# EAGLE board otto_single_sided (EAGLE 7.6.0)
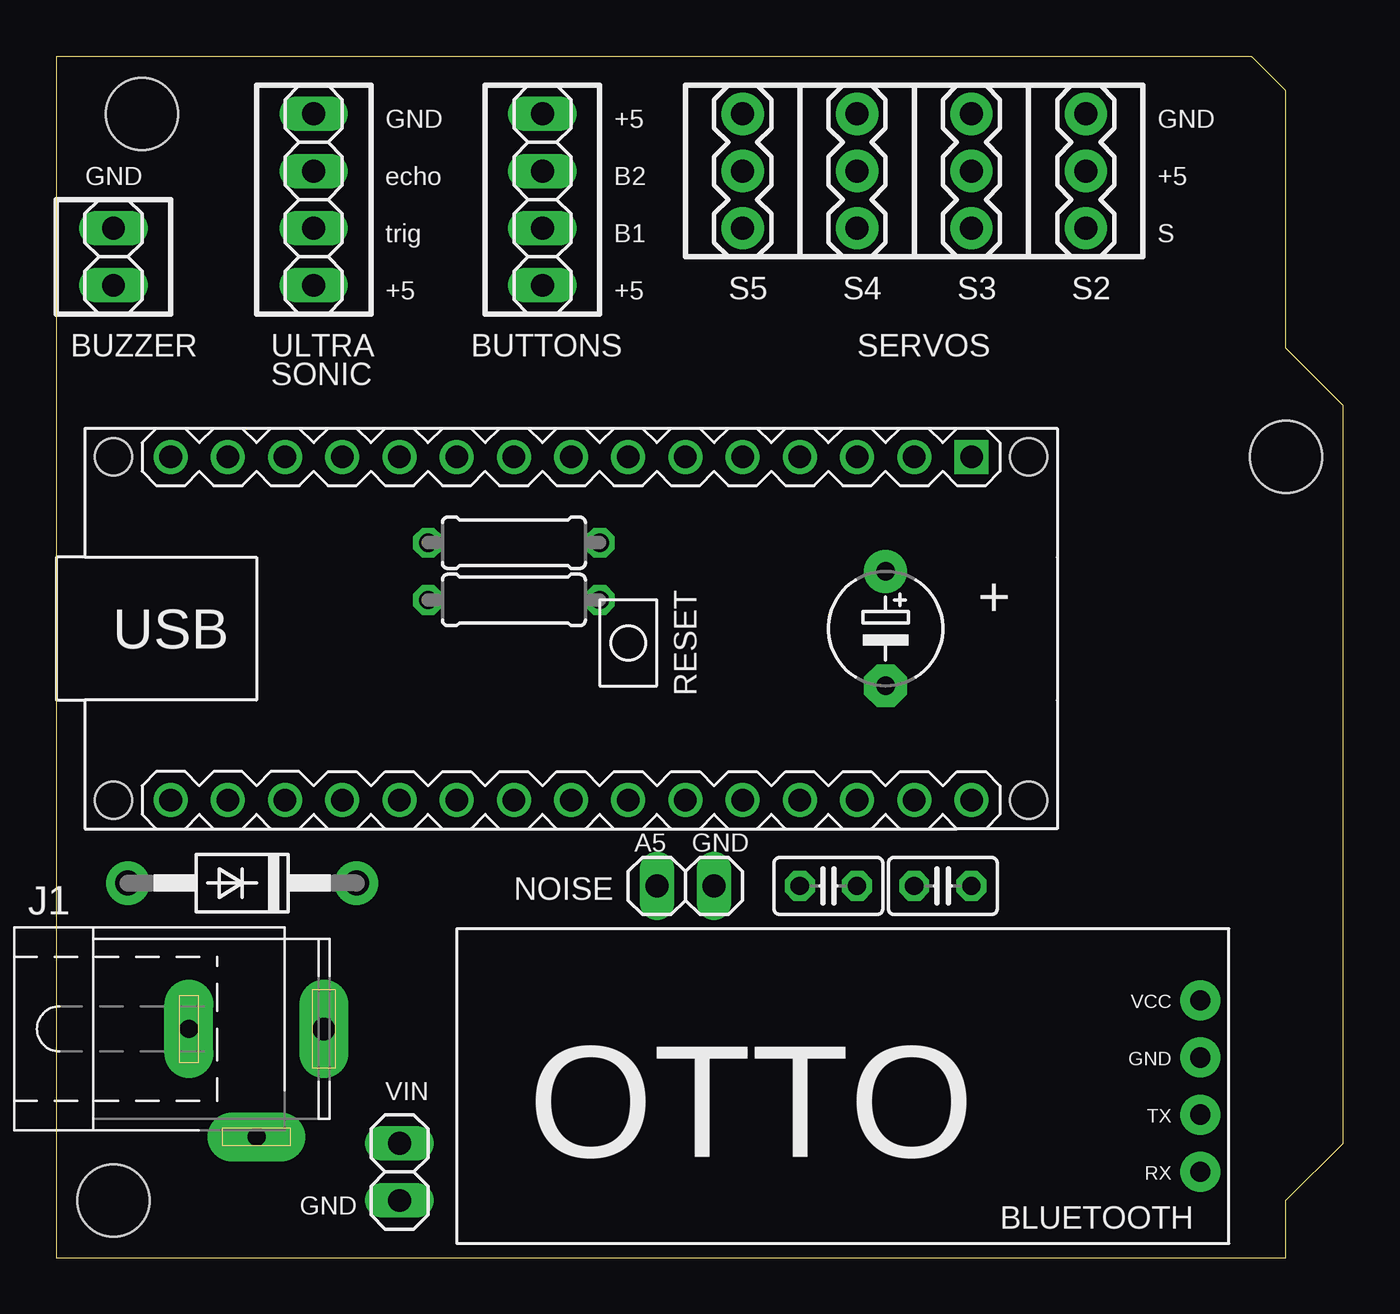
[diagram p0: board, top side]
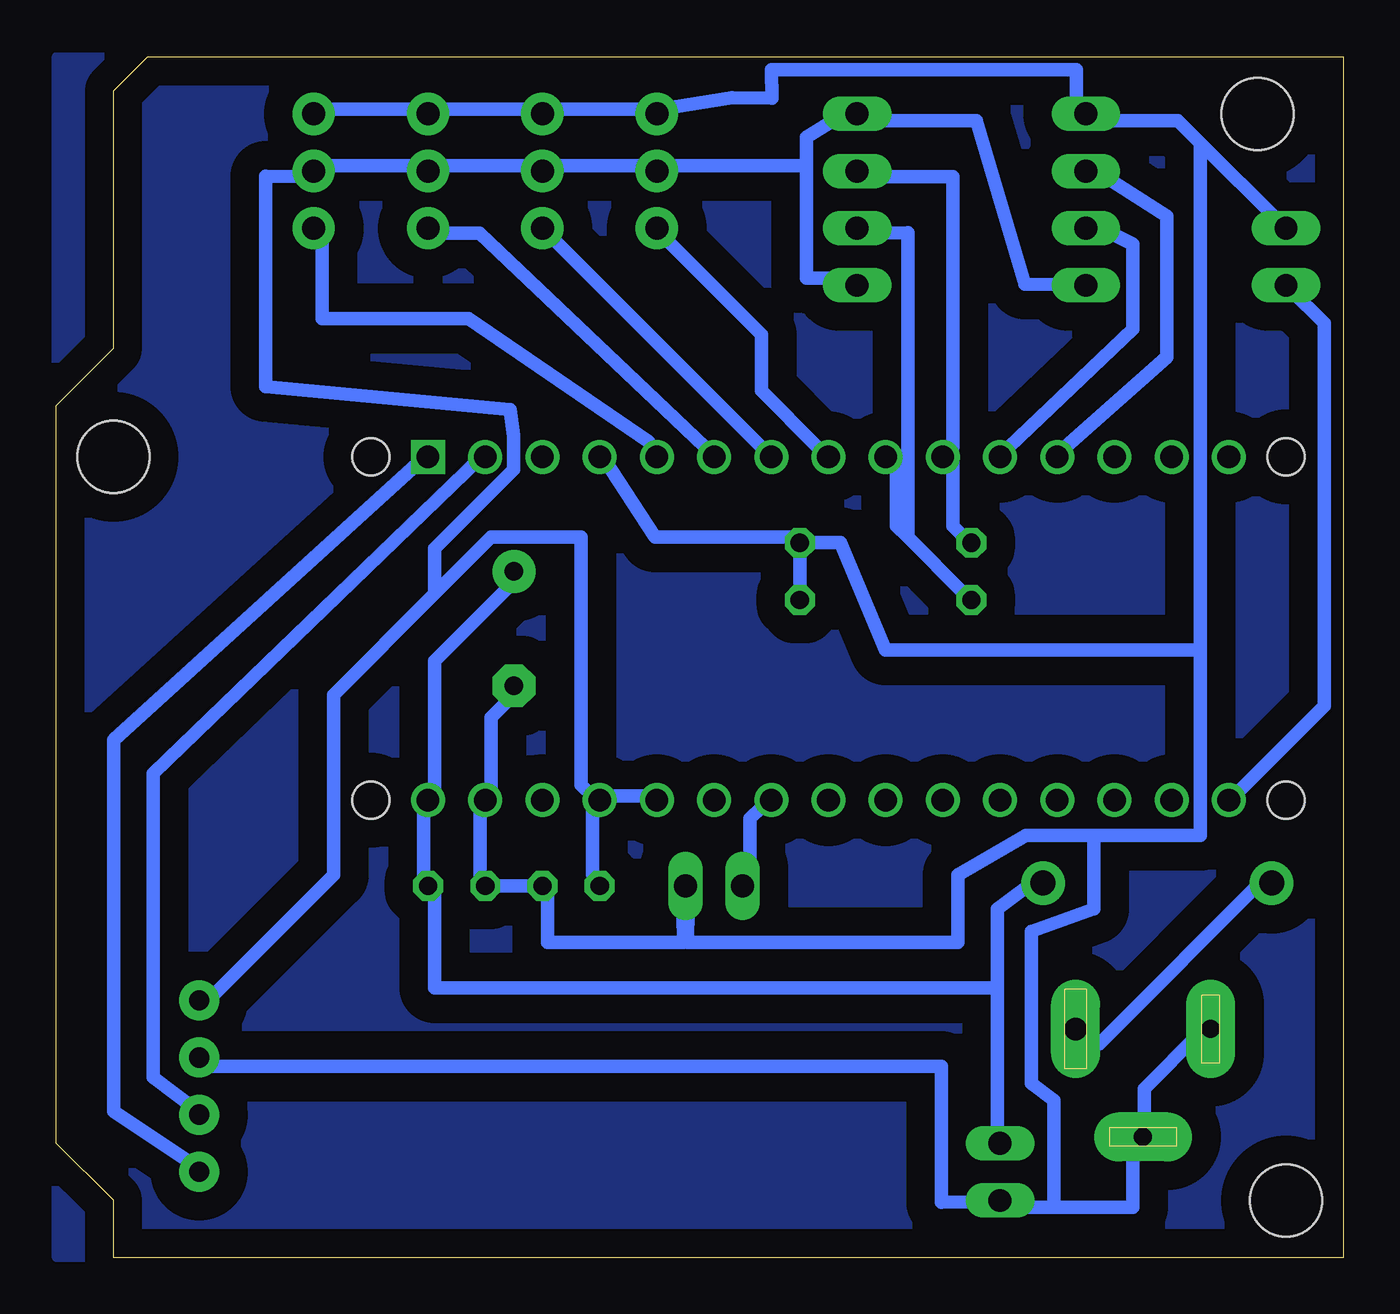
[diagram p1: board, bottom side, seen from below]

Size 57.15 x 53.34 mm. Coordinates in mm from the lower left corner, seen from the top.
Copper layers (1*16): Top 0.035mm / dielectric 1.5mm / Bottom 0.035mm
Design rules "default *": minimum track width 0.6mm, minimum drill 24mil, track to track 8mil, track to pad 8mil, pad to pad 8mil, via to via 8mil, smd to smd 8mil, copper to edge 0.3mm, drill to drill 8mil, minimum pad ring 10mil, minimum via ring 8mil, stop-mask expansion 4mil, vias tented up to drill 0mil, thermal gap 30mil

## Footprints (pad centres in the part's own frame; a part is rotated, then mirrored left to right if it is on the bottom)
C025-025X050 = drill 0.813 octagon: 1 -1.27,0; 2 1.27,0
E5-5 = drill 0.813 pad 1.905: + -2.54,0 | drill 0.813 pad 1.905 octagon: - 2.54,0
DO41-10 = drill 1.118 pad 1.93: A 5.08,0; C -5.08,0
SPC4077 = drill 0.8 pad 2.184 long: 1 -3,0; 2 0,-4.8 | drill 1 pad 2.184 long: 3 3,0
BT_BOARD_FOOTPRINT = drill 0.9 pad 1.778: GND -16.51,-1.27; RX -16.51,3.81; TX -16.51,1.27; VCC -16.51,-3.81
1X04 = drill 1.016 long: 1 -3.81,0; 2 -1.27,0; 3 1.27,0; 4 3.81,0
1X02 = drill 1.016 long: 1 -1.27,0; 2 1.27,0
ARDUINO-NANO-3.0 = drill 1 square: J1.1 17.78,7.62 | drill 1: J1.2 15.24,7.62; J1.3 12.7,7.62; J1.4 10.16,7.62; J1.5 7.62,7.62; J1.6 5.08,7.62; J1.7 2.54,7.62; J1.8 0,7.62; J1.9 -2.54,7.62; J1.10 -5.08,7.62; J1.11 -7.62,7.62; J1.12 -10.16,7.62; J1.13 -12.7,7.62; J1.14 -15.24,7.62; J1.15 -17.78,7.62; J2.1 17.78,-7.62; J2.2 15.24,-7.62; J2.3 12.7,-7.62; J2.4 10.16,-7.62; J2.5 7.62,-7.62; J2.6 5.08,-7.62; J2.7 2.54,-7.62; J2.8 0,-7.62; J2.9 -2.54,-7.62; J2.10 -5.08,-7.62; J2.11 -7.62,-7.62; J2.12 -10.16,-7.62; J2.13 -12.7,-7.62; J2.14 -15.24,-7.62; J2.15 -17.78,-7.62 | hole 1.651: -20.32,7.62; -20.32,-7.62; 20.32,-7.62; 20.32,7.62
1X03 = drill 1.016 pad 1.88: 1 0,0; 2 2.54,0; 3 5.08,0
0207/7 = drill 0.813 octagon: 1 -3.81,0; 2 3.81,0
ARDUINOSHIELDSMALL = hole 3.2: -13.97,33.02; 36.83,17.78; -15.24,-15.24

## Placement (x,y rotation side)
C1  100nF  [C025-025X050]  39.37,16.51 180 top
C2  47uF  [E5-5]  36.83,27.94 270 top
C3  100nF  [C025-025X050]  34.29,16.51 0 top
DP1  1N4004  [DO41-10]  8.25,16.64 180 top
J1  [SPC4077]  8.89,10.16 0 top
J_BT_BOARD_1  BLUETOOTH_BOARD  [BT_BOARD_FOOTPRINT]  34.29,7.62 180 top
JP1  [1X04]  11.43,46.99 90 top
JP2  [1X02]  15.24,3.81 270 top
JP3  [1X02]  2.54,44.45 90 top
JP4  [1X02]  27.94,16.51 0 top
JP5  [1X04]  21.59,46.99 90 top
M1  ARDUINO-NANO-3.0  [ARDUINO-NANO-3.0]  22.86,27.94 0 top
M2  SMALL_SERVO  [1X03]  45.72,45.72 90 top
M3  SMALL_SERVO  [1X03]  40.64,45.72 90 top
M4  SMALL_SERVO  [1X03]  35.56,45.72 90 top
M5  SMALL_SERVO  [1X03]  30.48,45.72 90 top
R1  10K  [0207/7]  20.32,29.21 0 top
R2  10K  [0207/7]  20.32,31.75 0 top
U$1  SHIELDSMALL  [ARDUINOSHIELDSMALL]  17.78,17.78 0 top

## Library data of the parts
C1-C3 R1 R2 = rcl
DP1 U$1 = adafruit
J1 = con-jack; OC_FARNELL: unknown; OC_NEWARK: unknown
J_BT_BOARD_1 = Bluetooth HC-05
JP1-JP5 = pinhead
M1 = diy-modules
M2-M5 = SparkFun-Electromechanical

## Nets
3V3: M1.J2.14
+5V: C3.1 J_BT_BOARD_1.VCC JP1.1 JP5.1 JP5.4 M1.J2.4 M1.J2.5 M2.2 M3.2 M4.2 M5.2
BUTTON1: JP5.2 M1.J1.9 R1.1
BUTTON2: JP5.3 M1.J1.10 R2.1
BUZZER: JP3.1 M1.J2.15
CLK: M1.J1.14
CS: M1.J1.13
DIN: M1.J1.15
ECHO: JP1.3 M1.J1.12
GND: C1.2 C2.- C3.2 J1.1 J1.2 J_BT_BOARD_1.GND JP1.4 JP2.2 JP3.2 JP4.2 M1.J1.4 M1.J2.2 M2.3 M3.3 M4.3 M5.3 R1.2 R2.2
N$9: DP1.A J1.3
NOISE: JP4.1 M1.J2.7
RX: J_BT_BOARD_1.TX M1.J1.2
SERVO1: M1.J1.5 M2.1
SERVO2: M1.J1.6 M3.1
SERVO3: M1.J1.7 M4.1
SERVO4: M1.J1.8 M5.1
TRIG: JP1.2 M1.J1.11
TX: J_BT_BOARD_1.RX M1.J1.1
V+: C1.1 C2.+ DP1.C JP2.1 M1.J2.1

## Tracks (layer width: path | path; a pad name or v marks a point on that pad's centre or on a via)
+5V
  Bottom 0.6: C3.1 33.34,17 33.34,20 M1.J2.4 | M1.J2.5 30.84,20.5 32.84,20.5 M1.J2.4 | 40.34,29.5 37.84,32 33.84,32 33.84,21 33.34,20.5 M1.J2.4 | 40.34,29.5 44.84,25 44.84,17 50.34,11.5 J_BT_BOARD_1.VCC | JP1.1 14.13,43.25 16.3,50.5 21.34,50.5 JP5.4 21.84,51 23.84,49.76 23.84,48.5 | 23.84,48.5 23.84,43.5 21.84,43.5 JP5.1 | 23.84,48.5 30.34,48.5 M5.2 30.84,48.5 35.34,48.5 M4.2 35.84,48.5 40.34,48.5 M3.2 40.84,48.5 45.34,48.5 M2.2 45.84,48 47.85,48.02 47.85,38.68 36.99,37.67 36.84,36.5 36.84,35 40.34,31.5 40.34,29.5
BUTTON1
  Bottom 0.6: 19.34,32 19.84,32.5 19.84,35.5 M1.J1.9 | 19.34,32 16.84,29.5 R1.1 | 19.34,32 19.34,45.53 21.34,45.5 JP5.2
BUTTON2
  Bottom 0.6: R2.1 16.84,32 17.34,32.5 17.34,35.5 M1.J1.10 17.33,36 17.33,48 21.34,48 JP5.3
BUZZER
  Bottom 0.6: M1.J2.15 4.84,20.5 0.84,24.5 0.84,41.5 2.34,43 JP3.1
ECHO
  Bottom 0.6: M1.J1.12 12.34,36 7.83,40 7.83,46.26 11.34,48.5 JP1.3
GND
  Bottom 0.6: 12.84,2.24 9.34,2.24 9.34,5 J1.2 8.84,5.5 8.84,7.5 6.34,10 J1.1 | 12.84,2.24 14.84,2.24 JP2.2 15.34,2.5 17.85,2.47 17.85,8.5 50.34,8.5 J_BT_BOARD_1.GND | C2.- 36.84,25 37.84,24 37.84,20.5 M1.J2.2 38.34,20 38.34,17 C1.2 37.84,16.5 35.84,16.5 C3.2 35.34,16.5 35.34,14 29.3,14 29.34,16.5 JP4.2 29.35,16.5 29.1,16.51 29.1,15.5 29.13,14 17.11,14 17.11,17 14.09,18.75 11.08,18.75 | M2.3 45.34,51 40.84,51 M3.3 40.34,51 35.84,51 M4.3 35.34,51 30.84,51 M5.3 30.34,51 27.14,51.51 25.36,51.5 25.38,52.75 11.84,52.75 11.84,51 JP1.4 11.34,50.5 7.34,50.5 6.34,49.5 | M1.J1.4 32.84,35.5 30.55,32 24.34,32 R2.2 22.32,31.75 20.34,26.98 6.34,26.98 | 6.34,49.5 2.84,46 JP3.2 | 6.34,49.5 6.34,26.98 | 11.08,18.75 6.34,18.75 6.34,26.98 | 12.84,2.24 12.84,6.99 13.84,7.74 13.84,14.5 11.08,15.48 11.08,18.75
  Bottom 0.61: R1.2 R2.2
N$1
  pour Bottom (isolate 1.27): 0,0 57.15,0 57.15,53.34 0,53.34
N$9
  Bottom 0.6: DP1.A 3.34,17 10.84,9.5 11.84,9.5 11.84,10 J1.3
NOISE
  Bottom 0.6: M1.J2.7 25.84,20 26.34,19.5 26.34,17 JP4.1
RX
  Bottom 0.6: M1.J1.2 38.34,35.5 52.85,21.5 52.85,8 50.84,6.5 J_BT_BOARD_1.TX
SERVO1
  Bottom 0.6: M1.J1.5 30.84,36.25 38.84,41.71 45.34,41.71 45.34,45.5 M2.1
SERVO2
  Bottom 0.6: M1.J1.6 28.34,36 38.35,45.5 40.34,45.5 M3.1
SERVO3
  Bottom 0.6: M4.1 M1.J1.7
SERVO4
  Bottom 0.6: M1.J1.8 23.34,36 25.84,38.5 25.84,41 30.34,45.5 M5.1
TRIG
  Bottom 0.6: M1.J1.11 14.84,36 9.34,41.25 9.34,45.02 11.34,46 JP1.2
TX
  Bottom 0.6: M1.J1.1 40.84,35.5 54.61,23 54.61,6.5 50.84,4 J_BT_BOARD_1.RX
V+
  Bottom 0.6: 15.35,11.98 15.35,15.5 13.34,17 DP1.C | 15.35,11.98 15.35,5.5 JP2.1 | C2.+ 36.84,30 40.34,26.5 40.34,20.5 M1.J2.1 40.84,20 40.84,17 C1.1 40.34,16.5 40.34,11.98 15.35,11.98

## Text on the board
tNames: GND | +5 | GND | GND | echo | B2 | +5 | trig | B1 | S | +5 | +5 | S5 | S4 | S3 | S2 | BUZZER | ULTRA | BUTTONS | SERVOS | SONIC | + | A5 | GND | NOISE | VIN | OTTO | GND | BLUETOOTH